# Altium PCB PCB.PcbDoc
Units mm, origin at the board's own origin, x right, y up, seen from the top; angles counter-clockwise.
Board outline 153.67 x 180.34 mm, 2 copper layers (Top Layer, Bottom Layer); 238 components, 189 nets, 780 pads, 0 vias.
Unrouted connection lines stored in the file: 557.
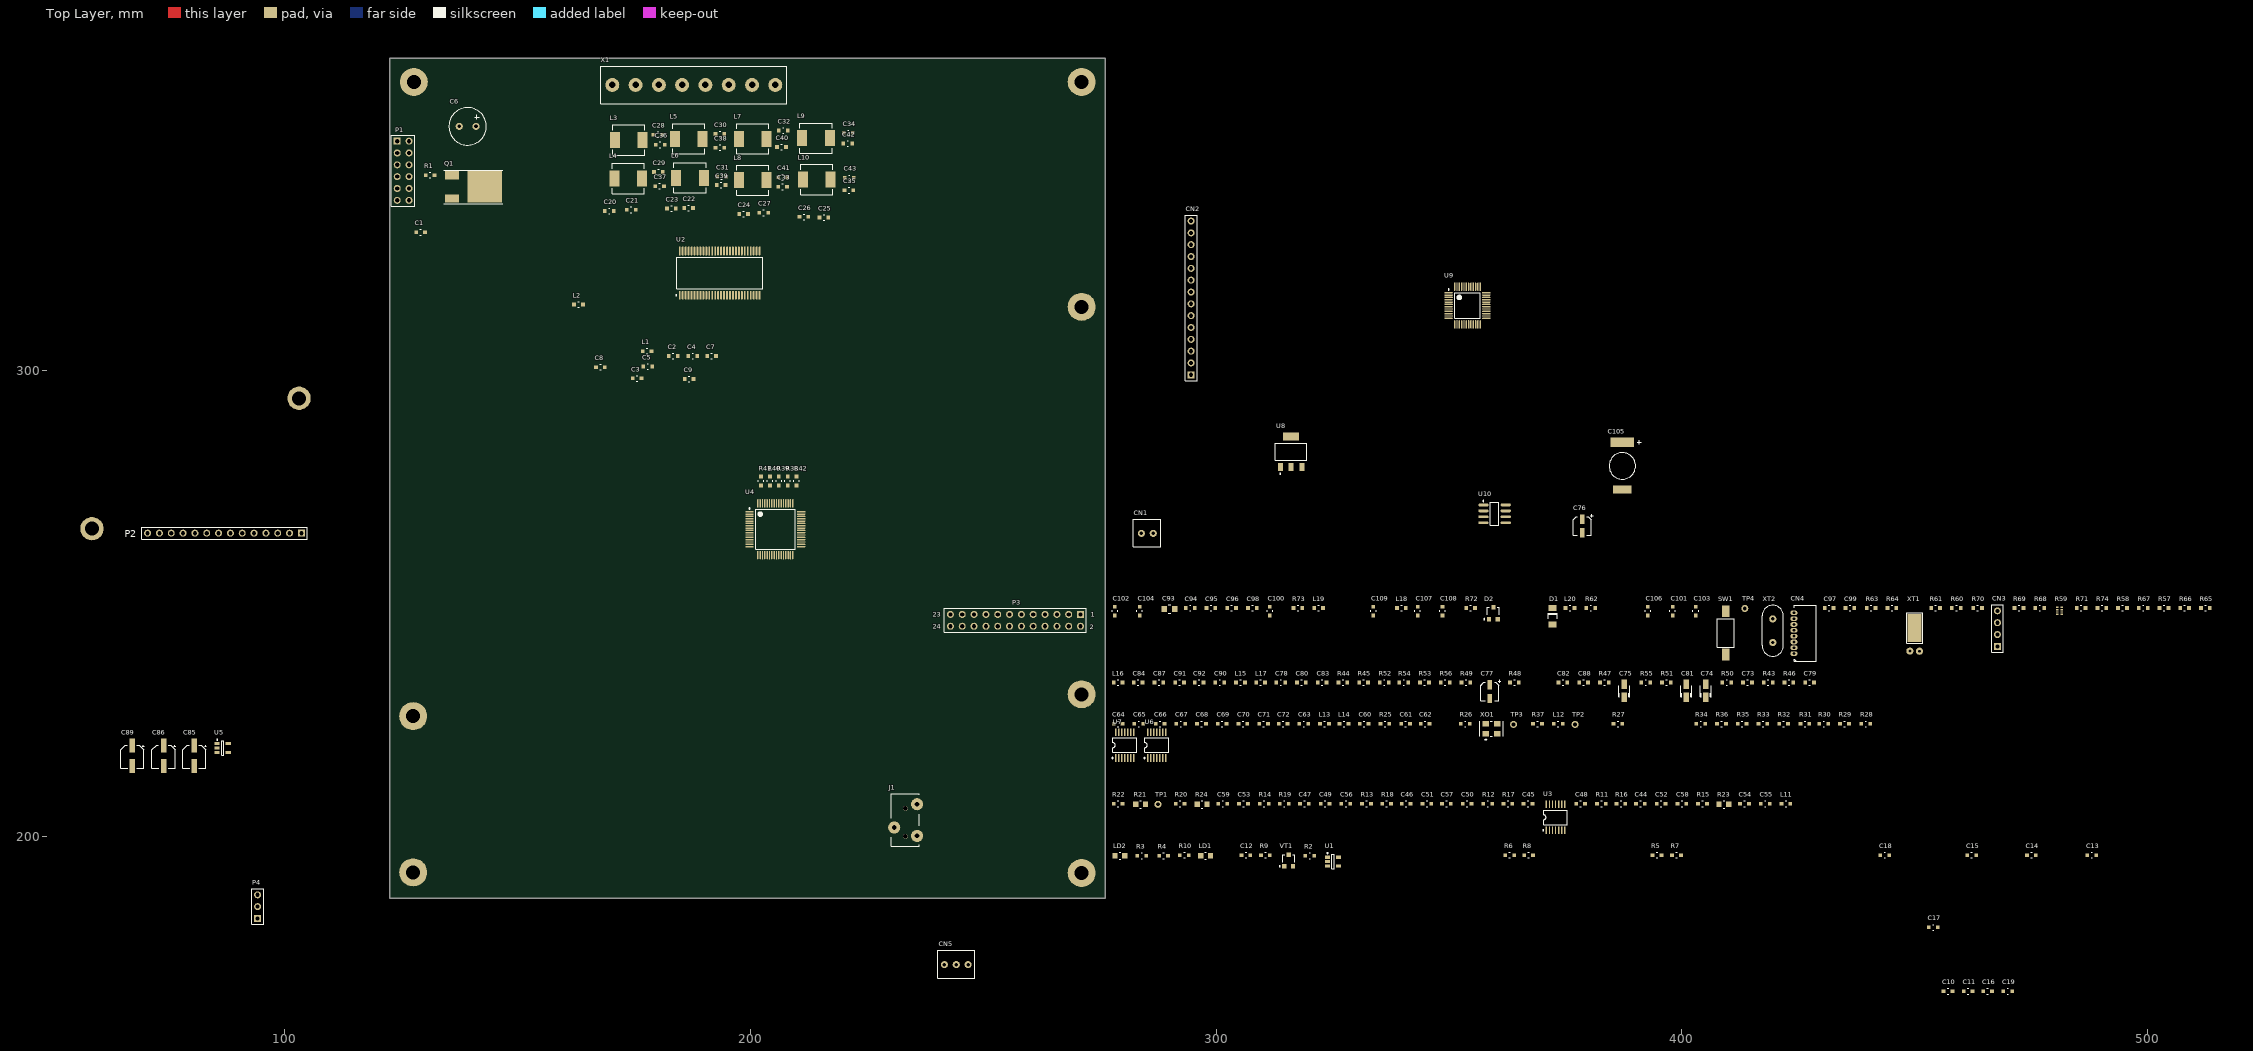
[diagram p0: Top Layer view]
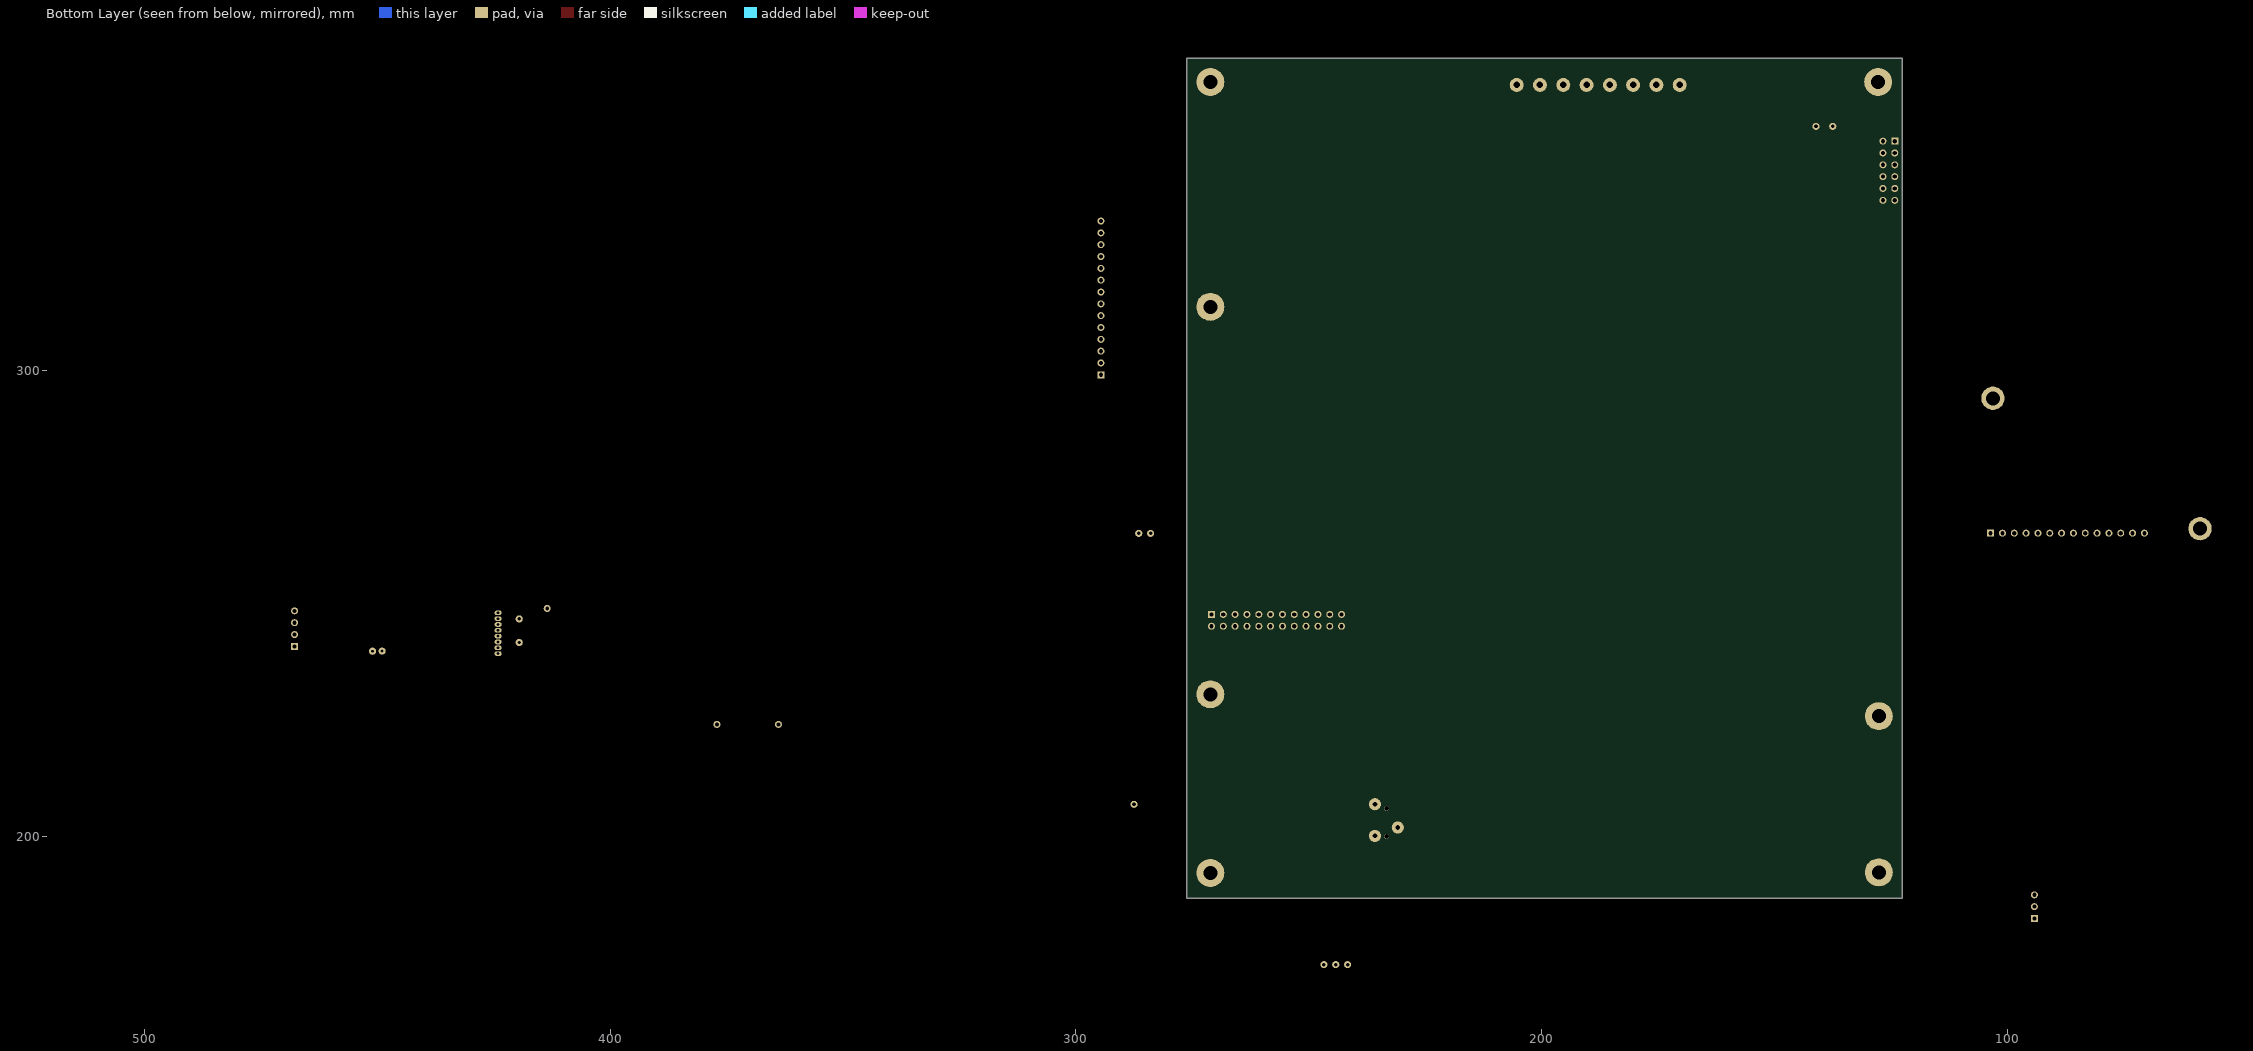
[diagram p1: Bottom Layer view, seen from below]

## Layer stack, top to bottom
Top Solder: solder mask 0.0102, Solder Resist, Dk 3.5
Top Layer: signal copper 0.0356
Dielectric 1: dielectric 0.32, FR-4, Dk 4.8
Bottom Layer: signal copper 0.0356
Bottom Solder: solder mask 0.0102, Solder Resist, Dk 3.5

## Board outline
122.555,367.03 122.555,186.69 276.225,186.69 276.225,367.03

## Design rules (kind name [scope] priority, off if disabled: settings)
Clearance [All] p1: gap=0.2 ignorepadtopadclearanceinfootprint=FALSE except(0.3: SMDPad-Fill SMDPad-Poly SMDPad-Region THPad-Fill THPad-Poly THPad-Region; 0.4: Arc-Fill Arc-Poly Arc-Region Track-Fill Track-Poly Track-Region Fill-Fill Fill-Poly Fill-Region Poly-Poly Poly-Region Region-Region)
DiffPairsRouting [All] p1: maxlimit=0.254 minlimit=0.2 mostfreqgap=0.22 toplayer_minwidth=0.2 toplayer_maxwidth=0.22 toplayer_prefwidth=0.22 bottomlayer_minwidth=0.2 bottomlayer_maxwidth=0.22 bottomlayer_prefwidth=0.22 maxuncoupledlength=12.7
HoleSize [All] p1: absolutevalues=TRUE maxlimit=5 minlimit=0.3 maxpercent=80.000 minpercent=20.000
PlaneConnect [All] p1: pad.planeconnectstyle=Relief pad.reliefexpansion=0.508 pad.reliefentries=4 pad.reliefconductorwidth=0.8 pad.reliefairgap=0.4 via.planeconnectstyle=Direct via.reliefexpansion=0.508 via.reliefentries=4 via.reliefconductorwidth=0.254 via.reliefairgap=0.254
PolygonConnect [All] p1: thpad.connectstyle=Relief thpad.reliefconductorwidth=0.8 thpad.reliefentries=4 thpad.polygonreliefangle="90 Angle" thpad.airgapwidth=0.4 smdpad.connectstyle=Relief smdpad.reliefconductorwidth=0.5 smdpad.reliefentries=4 smdpad.polygonreliefangle="90 Angle" smdpad.airgapwidth=0.4 via.connectstyle=Direct via.reliefconductorwidth=0.254 via.reliefentries=4 via.polygonreliefangle="90 Angle" via.airgapwidth=0.254
RoomDefinition mcu [InComponentClass('mcu')] p1 off: confinementstyle=ConfineIn formatcopy=TRUE lockcomponents=FALSE outline 277.368,237.236 526.034,237.236 526.034,251.968 277.368,251.968
RoomDefinition audio_in [InComponentClass('audio_in')] p2 off: confinementstyle=ConfineIn formatcopy=TRUE lockcomponents=FALSE outline 277.368,228.346 429.387,228.346 429.387,235.966 277.368,235.966
RoomDefinition audio_dsp [InComponentClass('audio_dsp')] p3 off: confinementstyle=ConfineIn formatcopy=TRUE lockcomponents=FALSE outline 284.988,210.947 463.804,210.947 463.804,226.822 284.988,226.822
RoomDefinition audio_amp_hf [InComponentClass('audio_amp_hf')] p4 off: confinementstyle=ConfineIn formatcopy=TRUE lockcomponents=FALSE outline 277.368,200.152 423.926,200.152 423.926,209.931 277.368,209.931
RoomDefinition audio_amp [InComponentClass('audio_amp')] p5 off: confinementstyle=ConfineIn formatcopy=TRUE lockcomponents=FALSE outline 277.368,188.214 619.887,188.214 619.887,198.882 277.368,198.882
RoutingVias [All] p1: holewidth=0.3 width=0.8 viastyle="Through Hole" minholewidth=0.3 minwidth=0.8 maxholewidth=0.6 maxwidth=1.5
SolderMaskExpansion [All] p1: expansion=0.102
Width [All] p1: maxlimit=4 minlimit=0.2 preferedwidth=0.3 minimp=50.000000 maximp=50.000000 favimp=50.000000
27 further rules are at their usual default settings.

## Classes and differential pairs
component class mcu: C10 C17 C20 C23 C28 C30 C31 C36 C39 C65 C78 C95 C97 C99 C102 C105 C107 CN2 CN3 CN4 CN5 D1 D2 L11 L18 L20 R29 R57 R59 R60 R61 R63 R64 R65 R66 R67 R68 R69 R70 R71 R72 R74 SW1 TP4 U8 U9 U10 XT1 XT2
component class audio_in: C15 C18 C23 C24 C25 C27 C32 C33 C40 C54 C57 C64 C73 C75 C76 C78 C81 C83 C89 C97 C99 CN1 CN2 CN3 L13 L14 L18 R9 R15 R19 R23 R32 R33 R43 R45 R46 R48 R50 R51 R55 R56 U1 U4 U6 U7 U8
component class audio_dsp: C18 C20 C25 C30 C44 C45 C48 C52 C60 C65 C75 C105 C106 L13 L14 L15 P1 P3 P4 R4 R6 R12 R16 R17 R19 R23 R31 R36 R37 R39 R40 R41 R46 R48 R64 R72 TP2 TP3 U4 XO1
component class audio_amp: C1 C2 C4 C5 C6 C7 C8 C9 C11 C12 C15 C17 C18 C20 C23 C24 C25 C27 C30 C31 C32 C33 C35 C36 C39 C47 C48 C49 C59 C65 C69 C72 C75 C78 C83 C86 C88 C91 C95 C97 C98 C102 C105 L1 L2 L3 L4 L5 L6 L7 L8 L9 L10 LD1 LD2 P4 Q1 R1 R4 R5 R9 R10 R21 R24 R32 R56 U1 U2 VT1 X1 X2 X3 X4
component class audio_amp_hf: C33 C35 C43 C46 C48 C49 C52 C53 C54 C56 C57 C58 C59 C60 C107 J1 L14 R2 R12 R13 R17 R18 R19 R21 R23 R24 R32 R44 R45 R56 TP1 U1

## Components (designator, comment, footprint, x,y, rotation, side; value= is the part's Value field where it differs from the comment)
C1 "GRM188R61E105KA12D" C0603 130.175,329.692 r180 top value="1uF 25v"
C2 "CC0603KRX7R9BB104" C0603 182.499,303.149 r0 top value=0.1uF
C3 "CC0603KRX7R9BB104" C0603 174.752,298.323 r0 top value=0.1uF
C4 "GRM21BR61E106KA73L" C0603 186.69,303.149 r0 top value="10uF 25v"
C5 "GRM188R61E105KA12D" C0603 177.038,300.863 r0 top value="1uF 25v"
C6 "EEUFC1V222" R08H04 139.319,352.425 r180 top value="2200uF 25v"
C7 "CC0603KRX7R9BB104" C0603 190.754,303.149 r0 top value=0.1uF
C8 "GRM188R61E105KA12D" C0603 166.878,300.736 r0 top value="1uF 25v"
C9 "GRM21BR61E106KA73L" C0603 185.928,298.196 r0 top value="10uF 25v"
C10 "CC0603KRX7R9BB104" C0603 456.184,166.751 r0 top value=0.1uF
C11 "GRM21BR61E106KA73L" C0603 460.502,166.751 r0 top value="10uF 25v"
C12 "CC0603KRX7R9BB104" C0603 305.435,195.961 r0 top value=0.1uF
C13 "GRM188R61E105KA12D" C0603 487.045,195.961 r0 top value="1uF 25v"
C14 "GRM188R61E105KA12D" C0603 474.091,195.961 r0 top value="1uF 25v"
C15 "GRM188R61E105KA12D" C0603 461.264,195.961 r0 top value="1uF 25v"
C16 "CC0603KRX7R9BB104" C0603 464.693,166.751 r0 top value=0.1uF
C17 "GRM188R61E105KA12D" C0603 453.009,180.467 r0 top value="1uF 25v"
C18 "GRM188R61E105KA12D" C0603 442.595,195.961 r0 top value="1uF 25v"
C19 "GRM21BR61E106KA73L" C0603 469.011,166.751 r0 top value="10uF 25v"
C20 "CL10A225KA8NNNC" C0603 168.783,334.264 r0 top value="2.2uF 25v"
C21 "CL10A225KA8NNNC" C0603 173.482,334.518 r0 top value="2.2uF 25v"
C22 "CL10A225KA8NNNC" C0603 185.801,334.899 r0 top value="2.2uF 25v"
C23 "CL10A225KA8NNNC" C0603 182.118,334.772 r0 top value="2.2uF 25v"
C24 "CL10A225KA8NNNC" C0603 197.612,333.629 r0 top value="2.2uF 25v"
C25 "CL10A225KA8NNNC" C0603 214.862,332.867 r0 top value="2.2uF 25v"
C26 "CL10A225KA8NNNC" C0603 210.566,332.994 r0 top value="2.2uF 25v"
C27 "CL10A225KA8NNNC" C0603 201.93,333.883 r0 top value="2.2uF 25v"
C28 "CL10A105KB8NNNC" C0603 179.197,350.647 r0 top value="1uF 50v"
C29 "CL10A105KB8NNNC" C0603 179.324,342.646 r0 top value="1uF 50v"
C30 "CL10A105KB8NNNC" C0603 192.532,350.774 r0 top value="1uF 50v"
C31 "CL10A105KB8NNNC" C0603 192.913,341.63 r0 top value="1uF 50v"
C32 "CL10A105KB8NNNC" C0603 206.121,351.536 r0 top value="1uF 50v"
C33 "CL10A105KB8NNNC" C0603 205.994,339.471 r0 top value="1uF 50v"
C34 "CL10A105KB8NNNC" C0603 220.091,351.028 r0 top value="1uF 50v"
C35 "CL10A105KB8NNNC" C0603 220.218,338.709 r0 top value="1uF 50v"
C36 "CL10B103KB8NNNC" C0603 179.705,348.488 r0 top value=0.01uF
C37 "CL10B103KB8NNNC" C0603 179.578,339.598 r0 top value=0.01uF
C38 "CL10B103KB8NNNC" C0603 192.532,347.853 r0 top value=0.01uF
C39 "CL10B103KB8NNNC" C0603 192.786,339.852 r0 top value=0.01uF
C40 "CL10B103KB8NNNC" C0603 205.74,347.98 r0 top value=0.01uF
C41 "CL10B103KB8NNNC" C0603 205.994,341.503 r0 top value=0.01uF
C42 "CL10B103KB8NNNC" C0603 219.964,348.742 r0 top value=0.01uF
C43 "CL10B103KB8NNNC" C0603 220.302,341.376 r0 top value=0.01uF
C44 "CC0603MRX5R5BB106" C0603 390.144,207.01 r0 top value="10uF 6.3V"
C45 "CC0603MRX5R5BB106" C0603 366.014,207.01 r0 top value="10uF 6.3V"
C46 "CC0603MRX5R5BB106" C0603 339.852,207.01 r0 top value="10uF 6.3V"
C47 "CC0603MRX5R5BB106" C0603 318.008,207.01 r0 top value="10uF 6.3V"
C48 "CC0603JRNPO9BN151" C0603 377.317,207.01 r0 top value=150pF
C49 "CC0603JRNPO9BN151" C0603 322.453,207.01 r0 top value=150pF
C50 "CC0603JRNPO9BN470" C0603 352.933,207.01 r0 top value=47pF
C51 "CC0603JRNPO9BN470" C0603 344.297,207.01 r0 top value=47pF
C52 "CC0603JRNPO9BN470" C0603 394.589,207.01 r0 top value=47pF
C53 "CC0603JRNPO9BN470" C0603 304.927,207.01 r0 top value=47pF
C54 "CC0603MRX5R5BB106" C0603 412.496,207.01 r0 top value="10uF 6.3V"
C55 "C1608X7R1H104K080AA" C0603 416.941,207.01 r0 top value=0.1uF
C56 "GRM188R61H105KAALD" C0603 326.898,207.01 r0 top value=1uF
C57 "GRM188R61H105KAALD" C0603 348.488,207.01 r0 top value=1uF
C58 "CL10B103KB8NNNC" C0603 399.034,207.01 r0 top value=0.01uF
C59 "CL10B103KB8NNNC" C0603 300.482,207.01 r0 top value=0.01uF
C60 "CC0603KRX7R9BB104" C0603 330.835,224.155 r0 top value=0.1uF
C61 "30pF" C0603 339.725,224.155 r0 top value=15pF
C62 "1.2nF" C0603 343.916,224.155 r0 top
C63 "CC0603MRX5R5BB106" C0603 317.881,224.155 r0 top value="10uF 6.3v"
C64 "CC0603KRX7R9BB104" C0603 278.003,224.155 r0 top value=0.1uF
C65 "CC0603KRX7R9BB104" C0603 282.448,224.155 r0 top value=0.1uF
C66 "CC0603KRX7R9BB104" C0603 287.02,224.155 r0 top value=0.1uF
C67 "CC0603KRX7R9BB104" C0603 291.465,224.155 r0 top value=0.1uF
C68 "CC0603KRX7R9BB104" C0603 295.91,224.155 r0 top value=0.1uF
C69 "CC0603KRX7R9BB104" C0603 300.355,224.155 r0 top value=0.1uF
C70 "CC0603KRX7R9BB104" C0603 304.8,224.155 r0 top value=0.1uF
C71 "CC0603KRX7R9BB104" C0603 309.245,224.155 r0 top value=0.1uF
C72 "CC0603KRX7R9BB104" C0603 313.436,224.155 r0 top value=0.1uF
C73 "CC0603KRX7R9BB104" C0603 413.131,233.045 r0 top value=0.1uF
C74 "CAP_POL" TANTAL-A-1206 405.13,231.267 r90 top value=1uF
C75 "CAP_POL" TANTAL-A-1206 387.604,231.267 r90 top value=1uF
C76 "UWT1V3R3MCL2B" ALUM_3.3 378.587,266.7 r0 top value=3.3uF
C77 "UWT1V3R3MCL2B" ALUM_3.3 358.775,231.14 r0 top value=3.3uF
C78 "0.01uF" C0603 312.928,233.045 r0 top
C79 "10pF" C0603 426.466,233.045 r0 top
C80 "0.01uF" C0603 317.373,233.045 r0 top
C81 "CAP_POL" TANTAL-A-1206 400.939,231.267 r90 top value=1uF
C82 "CC0603KRX7R9BB104" C0603 373.507,233.045 r0 top value=0.1uF
C83 "CC0603KRX7R9BB104" C0603 321.818,233.045 r0 top value=0.1uF
C84 "CC0603KRX7R9BB104" C0603 282.321,233.045 r0 top value=0.1uF
C85 "EEEFP1C100AR" ALUM_5x5.4 80.645,217.297 r0 top value=10uF
C86 "CB016M0010RSB-0405" ALUM_5x5.4 74.041,217.297 r0 top value=10uF
C87 "CC0603KRX7R9BB104" C0603 286.766,233.045 r0 top value=0.1uF
C88 "0.01uF" C0603 377.952,233.045 r0 top
C89 "CB016M0010RSB-0405" ALUM_5x5.4 67.31,217.297 r0 top value=10uF
C90 "CC0603MRX5R5BB106" C0603 299.847,233.045 r0 top value="10uF 6.3v"
C91 "CC0603KRX7R9BB104" C0603 291.211,233.045 r0 top value=0.1uF
C92 "CC0603KRX7R9BB104" C0603 295.402,233.045 r0 top value=0.1uF
C93 "GRM21BR61E106KA73L" C0805 289.052,248.793 r0 top value="10uF 25v"
C94 "CC0603MRX5R5BB106" C0603 293.497,249.047 r0 top value="10uF 6.3v"
C95 "CC0603KRX7R9BB104" C0603 297.942,249.047 r0 top value=0.1uF
C96 "CC0603KRX7R9BB104" C0603 302.387,249.047 r0 top value=0.1uF
C97 "22pF" C0603 430.657,249.047 r0 top
C98 "CC0603KRX7R9BB104" C0603 306.832,249.047 r0 top value=0.1uF
C99 "22pF" C0603 435.102,249.047 r0 top
C100 "CC0603KRX7R9BB104" C0603 311.531,247.396 r90 top value=0.1uF
C101 "22pF" C0603 398.018,247.396 r90 top
C102 "CC0603KRX7R9BB104" C0603 278.257,247.396 r90 top value=0.1uF
C103 "22pF" C0603 402.971,247.396 r90 top
C104 "CC0603MRX5R5BB106" C0603 283.591,247.396 r90 top value="10uF 6.3v"
C105 "CAP_POL" DS/DSK 387.223,279.527 r0 top value=0.22F
C106 "C1608X7R1H104K080AA" C0603 392.684,247.396 r90 top value=0.1uF
C107 "CC0603KRX7R9BB104" C0603 343.281,247.396 r90 top value=0.1uF
C108 "CC0603MRX5R5BB106" C0603 348.615,247.396 r90 top value="10uF 6.3v"
C109 "100pF" C0603 333.756,247.396 r90 top
CN1 "MIC" DG308-2.54-2P 285.242,265.049 r0 top
CN2 "AUX" PLS-14 294.64,299.085 r90 top
CN3 "SWD" PLS-4 467.741,240.792 r90 top
CN4 "KEYS" 1.25-8AW 424.053,243.586 r90 top
CN5 "DGxxx-3" DG308-2.54-3P 244.221,172.466 r0 top
D1 "SHOTTKY" SOD-80C 372.237,247.269 r90 top value=BAS86
D2 "PESD" SOT-23-3 359.537,247.904 r0 top value=PESDCAN
J1 "AUB-13" AUB-13 233.299,203.2 r90 top value="HP Jack"
L1 "BLM18AG102SN1D" IND0603 176.911,304.165 r0 top value=EMIF
L2 "BLM18AG102SN1D" IND0603 162.179,314.198 r0 top value=EMIF
L3 "IHLP2525CZER3R3M01" IHLP-2525CZ 173.936,349.504 r0 top value=3.3uH
L4 "IHLP2525CZER3R3M01" IHLP-2525CZ 173.809,341.249 r0 top value=3.3uH
L5 "IHLP2525CZER3R3M01" IHLP-2525CZ 186.817,349.758 r0 top value=3.3uH
L6 "IHLP2525CZER3R3M01" IHLP-2525CZ 187.071,341.376 r0 top value=3.3uH
L7 "IHLP2525CZER3R3M01" IHLP-2525CZ 200.533,349.758 r0 top value=3.3uH
L8 "IHLP2525CZER3R3M01" IHLP-2525CZ 200.533,340.868 r0 top value=3.3uH
L9 "IHLP2525CZER3R3M01" IHLP-2525CZ 214.122,349.885 r0 top value=3.3uH
L10 "IHLP2525CZER3R3M01" IHLP-2525CZ 214.249,340.995 r0 top value=3.3uH
L11 "BLM18AG102SN1D" IND0603 421.386,207.01 r0 top value=EMIF
L12 "BLM18AG102SN1D" IND0603 372.491,224.155 r0 top value=EMIF
L13 "BLM18AG102SN1D" IND0603 322.326,224.155 r0 top value=EMIF
L14 "BLM18AG102SN1D" IND0603 326.517,224.155 r0 top value=EMIF
L15 "BLM18AG102SN1D" IND0603 304.292,233.045 r0 top value=EMIF
L16 "BLM18AG102SN1D" IND0603 278.003,233.045 r0 top value=EMIF
L17 "BLM18AG102SN1D" IND0603 308.61,233.045 r0 top value=EMIF
L18 "BLM18AG102SN1D" IND0603 338.836,249.047 r0 top value=EMIF
L19 "BLM18AG102SN1D" IND0603 321.056,249.047 r0 top value=EMIF
L20 "BLM18AG102SN1D" IND0603 375.031,249.047 r0 top value=EMIF
LD1 "LED_Y" R0805 296.799,195.834 r0 top
LD2 "LED_R" R0805 278.384,195.834 r0 top
P1 "VIN" PLD-6 124.206,349.25 r270 top locked
P2 "HDR 14" PLS-14 103.632,265.091 r180 top locked
P3 "AUX AUDIO" PLD-12 270.901,247.65 r180 top locked
P4 "HDR 3" PLS-3 94.234,182.372 r90 top
Q1 "IRFR5305" D-PAK 140.716,339.344 r270 top
R1 "RES" R0603 132.207,341.944 r180 top value=47k
R2 "RES" R0603 319.151,195.834 r0 top value=10k
R3 "RES" R0603 283.083,195.834 r0 top value=10k
R4 "RES" R0603 287.782,195.834 r0 top value=10k
R5 "47k" R0603 393.7,195.961 r0 top value=DNI
R6 "47k" R0603 362.077,195.961 r0 top value=0
R7 "47k" R0603 397.891,195.961 r0 top value=DNI
R8 "47k" R0603 366.141,195.961 r0 top value=0
R9 "470" R0603 309.626,195.961 r0 top
R10 "470" R0603 292.227,195.961 r0 top
R11 "30k" R0603 381.762,207.01 r0 top
R12 "30k" R0603 357.378,207.01 r0 top
R13 "30k" R0603 331.343,207.01 r0 top
R14 "30k" R0603 309.372,207.01 r0 top
R15 "30k" R0603 403.479,207.01 r0 top
R16 "43k" R0603 385.953,207.01 r0 top
R17 "43k" R0603 361.696,207.01 r0 top
R18 "43k" R0603 335.661,207.01 r0 top
R19 "43k" R0603 313.69,207.01 r0 top
R20 "30k" R0603 291.338,207.01 r0 top
R21 "100" R0805 282.829,206.883 r0 top
R22 "100k" R0603 278.003,207.01 r0 top
R23 "10" R0805 408.051,206.883 r0 top
R24 "10" R0805 296.037,206.883 r0 top
R25 "47k" R0603 335.28,224.155 r0 top value=100k
R26 "22" R0603 352.552,224.155 r0 top
R27 "0" R0603 385.318,224.155 r0 top
R28 "0" R0603 438.531,224.155 r0 top
R29 "22" R0603 433.959,224.155 r0 top
R30 "22" R0603 429.514,224.155 r0 top
R31 "22" R0603 425.45,224.155 r0 top
R32 "22" R0603 420.878,224.155 r0 top
R33 "22" R0603 416.433,224.155 r0 top
R34 "0" R0603 403.098,224.155 r0 top
R35 "100k" R0603 411.988,224.155 r0 top
R36 "100k" R0603 407.543,224.155 r0 top
R37 "3.4k" R0603 368.046,224.155 r0 top
R38 "22" R0603 208.026,277.241 r270 top
R39 "22" R0603 206.123,277.241 r270 top
R40 "22" R0603 204.216,277.241 r270 top
R41 "22" R0603 202.311,277.241 r270 top
R42 "22" R0603 209.931,277.241 r270 top
R43 "5.6k" R0603 417.576,233.045 r0 top
R44 "100k" R0603 326.263,233.045 r0 top
R45 "100k" R0603 330.708,233.045 r0 top
R46 "75k" R0603 422.021,233.045 r0 top
R47 "75k" R0603 382.397,233.045 r0 top
R48 "100" R0603 363.093,233.045 r0 top
R49 "100" R0603 352.679,233.045 r0 top
R50 "75k" R0603 408.686,233.045 r0 top (schematic designator R49)
R51 "100" R0603 395.732,233.045 r0 top
R52 "0" R0603 335.153,233.045 r0 top
R53 "DNI" R0603 343.789,233.045 r0 top
R54 "0" R0603 339.344,233.045 r0 top
R55 "22" R0603 391.287,233.045 r0 top
R56 "22" R0603 348.234,233.045 r0 top
R57 "22" R0603 502.539,249.047 r0 top
R58 "22" R0603 493.649,249.047 r0 top
R59 "TC124-JR-0722RL" R0804X4 481.076,248.412 r0 top value=22
R60 "22" R0603 457.962,249.047 r0 top
R61 "22" R0603 453.517,249.047 r0 top
R62 "1k" R0603 379.476,249.047 r0 top
R63 "390" R0603 439.674,249.047 r0 top
R64 "0" R0603 444.119,249.047 r0 top value=1k
R65 "100" R0603 511.429,249.047 r0 top
R66 "22" R0603 506.984,249.047 r0 top
R67 "22" R0603 498.094,249.047 r0 top
R68 "22" R0603 475.869,249.047 r0 top
R69 "22" R0603 471.424,249.047 r0 top
R70 "22" R0603 462.534,249.047 r0 top
R71 "2k" R0603 484.759,249.047 r0 top
R72 "62" R0603 353.695,249.047 r0 top
R73 "62" R0603 316.611,249.047 r0 top
R74 "2k" R0603 489.204,249.047 r0 top
SW1 "RESET" TACTM-34N-F 409.448,243.586 r90 top value="SW tact 2-pin"
TP1 "TEST-POINT" PAD 287.528,206.883 r0 top
TP2 "TEST-POINT" PAD 377.063,224.028 r0 top
TP3 "TEST-POINT" PAD 363.855,224.028 r0 top
TP4 "TEST-POINT" PAD 413.512,248.92 r0 top (schematic designator TP3)
U1 "SN74LVC1G08DBVR" SOT-23-5 325.12,194.564 r0 top value=SN74LVC1G08
U2 "TAS6424" HSSOP-56 193.421,320.929 r90 top
U3 "TPA6138A2PW" TSSOP-14 372.872,204.089 r0 top
U4 "STA309A" PM064_N 205.373,265.938 r0 top
U5 "OPA172IDBVR" SOT-23-5 86.741,218.948 r0 top
U6 "PCM1808" TSSOP-14 287.274,219.583 r0 top
U7 "PCM1808" TSSOP-14 280.416,219.583 r0 top
U8 "1117-xxx" SOT-223 316.103,282.575 r0 top value=1117-3.3
U9 "STM32F303CBT6" STM-LQFP48_N 353.963,313.956 r0 top
U10 "SN65HVD232" D008_N 359.791,269.24 r0 top value=SN65HVD232D
VT1 "BC817" SOT-23-3 315.595,194.818 r0 top
X1 "DGxxx-8" DG126-5.0-8P 187.873,361.315 r0 top
XO1 "CXO-7C 12.288" CXO-5032 359.156,223.139 r0 top value=CXO-7C
XT1 "XTAL" DT38 449.961,243.967 r90 top value="32.768 KHz"
XT2 "XTAL" HC-49/S 419.481,244.094 r90 top value="8 MHz"

## Footprints (in the part's own frame and the unit in brackets; to place one, negate y for a bottom-side part, rotate by r counter-clockwise, add the part's x,y. Pads: shape width x height; smd on the part's side, far side on the other; paste and mask are expansions set on the pad)
1.25-8AW [mm] "Connector; 8 Positions; Right Angle"
  oval 1x1.5 hole 0.6: 1(-4.35,0) 2(-3.1,0) 3(-1.85,0) 4(-0.6,0) 5(0.65,0) 6(1.9,0) 7(3.15,0) 8(4.4,0)
  silkscreen extent -6.02,-4.8 6.05,-0.07, body extent -5.83,-4.5 5.83,0.9, height 3.68
ALUM_3.3 [mm]
  rect 1x2 smd: 1(0,1.397) 2(0,-1.524)
  silkscreen extent -1.91,-2.03 2.38,2.46, body extent -2.16,-2.3 2.14,2.3, height 5.63
ALUM_5x5.4 [mm]
  rect 1.2x3 smd: 1(0,2.2) 2(0,-2.2)
  silkscreen extent -2.5,-2.7 2.6,2.3, body extent -2.65,-3.2 2.65,2.8, height 5.9
AUB-13 [mm] "Stereo jack socket 3,5mm"
  round 2.6 hole 1: 1(-3.1,-2.5) 2(-1.3,2.4) 3(3.7,-2.5)
  round 1 hole 1 unplated: H(-3.2,0) H(2.8,0)
  silkscreen extent -5.3,-3 5.9,3, body extent -6.3,-2.5 4.7,2.5, height 4.25
C0603 [mm]
  rect 0.8x0.8 smd: 1(1.905,0) 2(0,0)
  silkscreen extent 0.8,-0.6 1.1,0.6, body extent 0.2,-0.4 1.8,0.4, height 0.9
C0805 [mm]
  rect 1.14x1.27 smd: 1(2.1,0) 2(-0.2,0)
  silkscreen extent 0.7,-0.9 1.2,0.9, body extent 0,-0.6 2,0.6, height 0.9
CXO-5032 [mm] "TXC 7C SMD CMOS CXO Oscillators"
  rect 1.4x1.2 smd: 1(-1.288,-1.134) 2(1.252,-1.134) 3(1.227,1.079) 4(-1.313,1.079)
  silkscreen extent -2.55,-2.37 2.45,1.63, body extent -1.65,-1.3 1.65,1.3, height 0.8
D008_N [mm] "8-Pin Small Outline Integrated Circuit 1.27 mm Pitch, IPC Medium Density"
  oval 2.2x0.6 smd: 1(-2.4,1.905) 2(-2.4,0.635) 3(-2.4,-0.635) 4(-2.4,-1.905) 5(2.4,-1.905) 6(2.4,-0.635) 7(2.4,0.635) 8(2.4,1.905)
  silkscreen extent -2.52,-2.5 0.9,2.88, body extent -3,-2.45 3,2.45, height 1.7
D-PAK [mm]
  rect 1.8x3 smd: 1(-2.6,-4.8) 3(2.4,-4.8)
  rect 6.8x7.47 smd: 2(-0.1,2.3)
  silkscreen extent -3.7,-6.5 3.5,6.1, body extent -3.4,-4.67 3.14,5.27, height 2.41
DG126-5.0-8P [mm] "PCB terminal block"
  round 3 hole 1.4: 1(-17.5,0) 2(-12.5,0) 3(-7.5,0) 4(-2.5,0) 5(2.5,0) 6(7.5,0) 7(12.5,0) 8(17.5,0)
  silkscreen extent -20,-4 20,4, body extent -20.25,-3.9 20,3.9, height 10.2
DG308-2.54-2P [mil] "PCB terminal block"
  round 60 hole 30: 1(-50,0) 2(50,0)
  silkscreen extent -120,-115 115,120, body extent -118,-119 110,119, height 308
DG308-2.54-3P [mil] "PCB terminal block"
  round 60 hole 30: 1(-100,0) 2(0,0) 3(100,0)
  silkscreen extent -155,-115 155,120, body extent -160,-117 155,120, height 308
DS/DSK [mm] "Coin Cell Capacitors"
  rect 5x2 smd: 1(0,5.1)
  rect 4x1.7 smd: 2(0,-5.1)
  silkscreen extent -2.84,-2.84 4,5.5, body extent -3.4,-5.75 3.4,5.95, height 2.8
DT38 [mm]
  round 1.54 hole 0.6: 1(-4.209,-1.023) 2(-4.191,1.016)
  rect 6x3 smd: 3(0.8,0)
  silkscreen extent -2.5,-1.7 4,1.7, body extent -5.27,-1.4 5.78,1.6, height 3
HC-49/S [mm]
  round 1.54 hole 0.7: 1(-2.48,-0.04) 2(2.6,-0.04)
  silkscreen extent -5.4,-2.33 5.52,2.25, body extent -5.4,-2.25 5.4,2.25, height 3.5
HSSOP-56 [mm] "PowerPAD HSSOP, 56-Leads, Body 18,41x7,49mm, Pitch 0.635mm, IPC Medium Density"
  oval 1.9x0.4 smd: 1(-4.75,8.572) 2(-4.75,7.938) 3(-4.75,7.302) 4(-4.75,6.667) 5(-4.75,6.032) 6(-4.75,5.397) 7(-4.75,4.763) 8(-4.75,4.127) 9(-4.75,3.492) 10(-4.75,2.858) 11(-4.75,2.222) 12(-4.75,1.587) 13(-4.75,0.952) 14(-4.75,0.317) 15(-4.75,-0.318) 16(-4.75,-0.953) 17(-4.75,-1.588) 18(-4.75,-2.223) 19(-4.75,-2.858) 20(-4.75,-3.492) 21(-4.75,-4.127) 22(-4.75,-4.763) 23(-4.75,-5.398) 24(-4.75,-6.032) 25(-4.75,-6.667) 26(-4.75,-7.303) 27(-4.75,-7.938) 28(-4.75,-8.572) 29(4.75,-8.572) 30(4.75,-7.938) 31(4.75,-7.302) 32(4.75,-6.667) 33(4.75,-6.032) 34(4.75,-5.397) 35(4.75,-4.763) 36(4.75,-4.128) 37(4.75,-3.492) 38(4.75,-2.857) 39(4.75,-2.222) 40(4.75,-1.587) 41(4.75,-0.952) 42(4.75,-0.317) 43(4.75,0.318) 44(4.75,0.953) 45(4.75,1.588) 46(4.75,2.223) 47(4.75,2.858) 48(4.75,3.492) 49(4.75,4.127) 50(4.75,4.763) 51(4.75,5.397) 52(4.75,6.032) 53(4.75,6.667) 54(4.75,7.302) 55(4.75,7.938) 56(4.75,8.572)
  silkscreen extent -4.87,-9.25 3.4,9.45, body extent -5.14,-9.2 5.14,9.2, height 2.41
IHLP-2525CZ [mm] "Low-Profile, High-Current IHLP® Inductor"
  rect 2.15x3.429 smd: 1(-2.975,0) 2(2.975,0)
  silkscreen extent -3.45,-3.25 3.45,3.25, body extent -3.54,-3.3 3.54,3.37, height 2.89
IND0603 [mm]
  rect 0.8x0.8 smd: 1(1.905,0) 2(0,0)
  silkscreen extent 0.8,-0.6 1.1,0.6
PAD [mm]
  round 1.5 hole 0.8: 1(0,0)
PLD-6 [mm] "Connector; Header; 6x2 Position"
  rect 1.5x1.5 hole 0.9: 1(0,0)
  round 1.5 hole 0.9: 2(0,2.54) 3(2.54,0) 4(2.54,2.54) 5(5.08,0) 6(5.08,2.54) 7(7.62,0) 8(7.62,2.54) 9(10.16,0) 10(10.16,2.54) 11(12.7,0) 12(12.7,2.54)
  silkscreen extent -1.27,-1.27 13.97,3.81
PLD-12 [mm] "Connector; Header; 12x2 Position"
  rect 1.5x1.5 hole 0.9: 1(0,0)
  round 1.5 hole 0.9: 2(0,2.54) 3(2.54,0) 4(2.54,2.54) 5(5.08,0) 6(5.08,2.54) 7(7.62,0) 8(7.62,2.54) 9(10.16,0) 10(10.16,2.54) 11(12.7,0) 12(12.7,2.54) 13(15.24,0) 14(15.24,2.54) 15(17.78,0) 16(17.78,2.54) 17(20.32,0) 18(20.32,2.54) 19(22.86,0) 20(22.86,2.54) 21(25.4,0) 22(25.4,2.54) 23(27.94,0) 24(27.94,2.54)
  silkscreen extent -1.27,-1.27 29.21,3.81
PLS-3 [mm] "Connector; Header; 3 Position"
  rect 1.5x1.5 hole 0.9: 1(0,0)
  round 1.5 hole 0.9: 2(2.54,0) 3(5.08,0)
  silkscreen extent -1.27,-1.27 6.35,1.27, body extent -1.27,-1.27 6.35,1.27, height 8.54
PLS-4 [mm] "Connector; Header; 4 Position"
  rect 1.5x1.5 hole 0.9: 1(0,0)
  round 1.5 hole 0.9: 2(2.54,0) 3(5.08,0) 4(7.62,0)
  silkscreen extent -1.27,-1.27 8.89,1.27, body extent -1.27,-1.27 8.89,1.27, height 8.44
PLS-14 [mm] "Connector; Header; 14 Position"
  rect 1.5x1.5 hole 0.9: 1(0,0)
  round 1.5 hole 0.9: 2(2.54,0) 3(5.08,0) 4(7.62,0) 5(10.16,0) 6(12.7,0) 7(15.24,0) 8(17.78,0) 9(20.32,0) 10(22.86,0) 11(25.4,0) 12(27.94,0) 13(30.48,0) 14(33.02,0)
  silkscreen extent -1.27,-1.27 34.29,1.27
PM064_N [mm] "64-Pin Thin Quad Flat Pack 0.5 mm Pitch, IPC Medium Density"
  oval 1.8x0.3 smd: 1(-5.55,3.75) 2(-5.55,3.25) 3(-5.55,2.75) 4(-5.55,2.25) 5(-5.55,1.75) 6(-5.55,1.25) 7(-5.55,0.75) 8(-5.55,0.25) 9(-5.55,-0.25) 10(-5.55,-0.75) 11(-5.55,-1.25) 12(-5.55,-1.75) 13(-5.55,-2.25) 14(-5.55,-2.75) 15(-5.55,-3.25) 16(-5.55,-3.75) 33(5.55,-3.75) 34(5.55,-3.25) 35(5.55,-2.75) 36(5.55,-2.25) 37(5.55,-1.75) 38(5.55,-1.25) 39(5.55,-0.75) 40(5.55,-0.25) 41(5.55,0.25) 42(5.55,0.75) 43(5.55,1.25) 44(5.55,1.75) 45(5.55,2.25) 46(5.55,2.75) 47(5.55,3.25) 48(5.55,3.75)
  oval 0.3x1.8 smd: 17(-3.75,-5.55) 18(-3.25,-5.55) 19(-2.75,-5.55) 20(-2.25,-5.55) 21(-1.75,-5.55) 22(-1.25,-5.55) 23(-0.75,-5.55) 24(-0.25,-5.55) 25(0.25,-5.55) 26(0.75,-5.55) 27(1.25,-5.55) 28(1.75,-5.55) 29(2.25,-5.55) 30(2.75,-5.55) 31(3.25,-5.55) 32(3.75,-5.55) 49(3.75,5.55) 50(3.25,5.55) 51(2.75,5.55) 52(2.25,5.55) 53(1.75,5.55) 54(1.25,5.55) 55(0.75,5.55) 56(0.25,5.55) 57(-0.25,5.55) 58(-0.75,5.55) 59(-1.25,5.55) 60(-1.75,5.55) 61(-2.25,5.55) 62(-2.75,5.55) 63(-3.25,5.55) 64(-3.75,5.55)
  silkscreen extent -5.67,-4.25 4.25,4.57, body extent -5,-5 5,5, height 1.6
R08H04 [mil] "Radius 8mm, between holes 4mm"
  round 60 hole 30: 1(-70.87,0) 2(70.87,0)
  silkscreen extent -158,-158 158,158, body extent -157,-157 157,157, height 472
R0603 [mm]
  rect 0.8x0.8 smd: 1(1.905,0) 2(0,0)
  silkscreen extent 0.8,-0.6 1.1,0.6, body extent 0.2,-0.4 1.8,0.4, height 0.5
R0804X4 [mm] "Chip Array, Flat, 8-Leads, Pitch 0,50mm,  Body 2,00x1,00mm,  IPC Medium Density"
  rect 0.5x0.3 smd: 1(-0.5,0.75) 2(0.5,0.75) 3(-0.5,0.25) 4(0.5,0.25) 5(-0.5,-0.25) 6(0.5,-0.25) 7(-0.5,-0.75) 8(0.5,-0.75)
  body extent -0.5,-1 0.5,1, height 0.4
R0805 [mm]
  rect 1.14x1.2 smd: 1(2,0) 2(-0.1,0)
  silkscreen extent 0.79,-0.8 1.1,0.8, body extent 0,-0.6 2,0.6, height 0.5
SOD-80C [mm]
  rect 1.25x1.7 smd: 1(-1.775,0) 2(1.775,0)
  silkscreen extent -0.6,-1 0.6,0.9, body extent -1.82,-0.8 1.88,0.8, height 1.6
SOT-23-3 [mm]
  rect 0.9x0.95 smd: 1(-0.95,-1.25) 2(0.95,-1.25) 3(0,1.25)
  silkscreen extent -2.07,-1.37 1.3,1.25, body extent -1.52,-1.29 1.48,1.25, height 1.1
SOT-23-5 [mm] "SOT23, 5-Leads, Body 2.9x1.6mm, Pitch 0.95mm, Lead Span 2.8mm, IPC Medium Density"
  rect 1.1x0.65 smd: 1(-1.2,0.95) 2(-1.2,0) 3(-1.2,-0.95) 4(1.2,-0.95) 5(1.2,0.95)
  silkscreen extent -1.32,-1.55 0.25,1.95, body extent -1.44,-1.5 1.4,1.5, height 1.1
SOT-223 [mm]
  rect 1.05x1.75 smd: 1(-2.3,-3.3) 2(0,-3.3) 3(2.3,-3.3)
  rect 3.4x1.75 smd: 4(0,3.3)
  silkscreen extent -3.35,-4.85 3.35,1.85, body extent -3.25,-3.43 3.25,3.46, height 1.6
STM-LQFP48_N [mm] "QFP, 48-Leads, Body 7x7mm, Pitch 0.5mm, IPC Medium Density"
  oval 1.8x0.3 smd: 1(-4.05,2.75) 2(-4.05,2.25) 3(-4.05,1.75) 4(-4.05,1.25) 5(-4.05,0.75) 6(-4.05,0.25) 7(-4.05,-0.25) 8(-4.05,-0.75) 9(-4.05,-1.25) 10(-4.05,-1.75) 11(-4.05,-2.25) 12(-4.05,-2.75) 25(4.05,-2.75) 26(4.05,-2.25) 27(4.05,-1.75) 28(4.05,-1.25) 29(4.05,-0.75) 30(4.05,-0.25) 31(4.05,0.25) 32(4.05,0.75) 33(4.05,1.25) 34(4.05,1.75) 35(4.05,2.25) 36(4.05,2.75)
  oval 0.3x1.8 smd: 13(-2.75,-4.05) 14(-2.25,-4.05) 15(-1.75,-4.05) 16(-1.25,-4.05) 17(-0.75,-4.05) 18(-0.25,-4.05) 19(0.25,-4.05) 20(0.75,-4.05) 21(1.25,-4.05) 22(1.75,-4.05) 23(2.25,-4.05) 24(2.75,-4.05) 37(2.75,4.05) 38(2.25,4.05) 39(1.75,4.05) 40(1.25,4.05) 41(0.75,4.05) 42(0.25,4.05) 43(-0.25,4.05) 44(-0.75,4.05) 45(-1.25,4.05) 46(-1.75,4.05) 47(-2.25,4.05) 48(-2.75,4.05)
  silkscreen extent -4.17,-2.75 2.75,3.57, body extent -3.5,-3.5 3.5,3.5, height 1.6
TACTM-34N-F [mm]
  rect 2.5x1.6 smd: 1(-4.545,0) 2(4.778,0)
  silkscreen extent -2.95,-1.78 3.17,1.82, body extent -3.88,-1.78 4.13,1.73, height 5.5
TANTAL-A-1206 [mm]
  rect 2x1.2 smd: 1(-1.4,0) 2(1.4,0)
  silkscreen extent -1.3,-1.2 1.1,1.2, body extent -1.6,-0.8 1.6,0.8, height 1.8
TSSOP-14 [mm] "Shrink Small Outline; 14 Leads; Body Width 4.4 mm; Pitch 0.65 mm"
  rect 0.3x1.65 smd: 1(-1.95,-2.775) 2(-1.3,-2.775) 3(-0.65,-2.775) 4(0,-2.775) 5(0.65,-2.775) 6(1.3,-2.775) 7(1.95,-2.775) 8(1.95,2.775) 9(1.3,2.775) 10(0.65,2.775) 11(0,2.775) 12(-0.65,2.775) 13(-1.3,2.775) 14(-1.95,2.775)
  silkscreen extent -2.77,-2.9 2.55,1.55, body extent -2.5,-3.2 2.5,3.2, height 1.2

## Part data
C1 C2 C3 C4 C5 C7 C8 C9 C10 C11 C12 C13 C14 C15 C16 C17 C18 C19 C20 C21 C22 C23 C24 C25 C26 C27 C28 C29 C30 C31 C32 C33 C34 C35 C36 C37 C38 C39 C40 C41 C42 C43 C44 C45 C46 C47 C48 C49 C50 C51 C52 C53 C54 C55 C56 C57 C58 C59 C60 C61 C62 C63 C64 C65 C66 C67 C68 C69 C70 C71 C72 C73 C78 C79 C80 C82 C83 C84 C87 C88 C90 C91 C92 C93 C94 C95 C96 C97 C98 C99 C100 C101 C102 C103 C104 C106 C107 C108 C109: library part CAP_NPOL, "CAP_NPOL"
C6 C76 C77 C85 C86 C89: library part CAP_POL, "CAP_POL"
CN1: library part "HDR 2", "Header, 2-Pin", LatestRevisionDate=17-Jul-2002, LatestRevisionNote="Re-released for DXP Platform.", Publisher="Altium Limited"
CN2: library part "HDR 14", "Header, 14-Pin", LatestRevisionDate=17-Jul-2002, LatestRevisionNote="Re-released for DXP Platform.", Publisher="Altium Limited"
CN3: library part "HDR 4", "Header, 4-Pin", LatestRevisionDate=17-Jul-2002, LatestRevisionNote="Re-released for DXP Platform.", Publisher="Altium Limited"
CN4: library part "HDR 8", "Header, 8-Pin", LatestRevisionDate=17-Jul-2002, LatestRevisionNote="Re-released for DXP Platform.", Publisher="Altium Limited"
CN5 TP1 TP2 TP3 TP4 X1: "PCB terminal block"
D2: library part TVS_BIDIR_DUAL, "TVS Diodes"
J1: library part PhoneJack, "Phonejack Stereo"
L1 L2 L11 L12 L13 L14 L15 L16 L17 L18 L19 L20: library part IND_WO_IRON, "IND_WO_IRON"
L3 L4 L5 L6 L7 L8 L9 L10: library part IND_W_IRON, "IND_W_IRON"
LD1: library part LED_YELLOW, "LED Yellow"
LD2: library part LED_RED, "LED Red"
P1: library part "HDR 6X2", "Header, 6-Pin, Dual row", LatestRevisionDate=17-Jul-2002, LatestRevisionNote="Re-released for DXP Platform.", Publisher="Altium Limited"
P2: "Header, 14-Pin", LatestRevisionDate=17-Jul-2002, LatestRevisionNote="Re-released for DXP Platform.", Publisher="Altium Limited"
P3: library part "HDR 12X2", "Header, 12-Pin, Dual row", LatestRevisionDate=17-Jul-2002, LatestRevisionNote="Re-released for DXP Platform.", Publisher="Altium Limited"
P4: "Header, 3-Pin", LatestRevisionDate=17-Jul-2002, LatestRevisionNote="Re-released for DXP Platform.", Publisher="Altium Limited"
Q1: library part P-Channel, "HEXFET Power MOSFET"
R1 R2 R3 R4: library part RESISTOR
R5 R6 R7 R8 R9 R10 R11 R12 R13 R14 R15 R16 R17 R18 R19 R20 R21 R22 R23 R24 R25 R26 R27 R28 R29 R30 R31 R32 R33 R34 R35 R36 R37 R38 R39 R40 R41 R42 R43 R44 R45 R46 R47 R48 R49 R50 R51 R52 R53 R54 R55 R56 R57 R58 R60 R61 R62 R63 R64 R65 R66 R67 R68 R69 R70 R71 R72 R73 R74: library part RESISTOR, "RES"
R59: library part ARRAY, "ARRAY"
SW1: library part "SW tact 2-pin", "Microswitches, DTSMB-3 series"
U1: library part SN74LVC1G08
U2: "75-W, 2-MHz Digital Input 4-Channel Automotive Class-D Audio Amplifier  With Load-Dump Protection and I  2C Diagnostics"
U3: library part TPA6138A2, "DirectPath™ Headphone Driver With Adjustable Gain"
U4: "Multi-channel digital audio processor with DDX®"
U5: "OPAx172 36-V, Single-Supply, 10-MHz, Rail-to-Rail Output Operational Amplifiers"
U6 U7: "PCM1808 Single-Ended, Analog-Input 24-Bit, 96-kHz Stereo ADC"
U8: library part LM1117, "LM1117"
U9: "ARM Cortex-M4 32-bit MCU, 128 KB Flash, 32 KB Internal RAM, 37 I/Os, 48-pin LQFP, -40 to 85 degC, Tray", I/Os (High Current)=37, Operating Frequency(F) (Processor speed) (MHz)=72, Supplier Part Number 1=STM32F303CBT6-ND, Supply Voltage(Vcc) min (V)=2, ComponentLink1Description="Manufacturer URL", ComponentLink1URL=http://www.st.com/web/en/home.html, ComponentLink2Description=Datasheet, ComponentLink2URL=http://www.st.com/st-web-ui/static/active/en/resource/technical/document/datasheet/DM00058181.pdf, ComponentLink3Description="Package Specification", ComponentLink3URL=http://www.st.com/st-web-ui/static/active/en/resource/technical/document/datasheet/DM00058181.pdf, Core="ARM Cortex-M4", D/A Converter="2x12-bit (2 Channel)", DatasheetVersion="Rev. 6", FLASH Size (Prog) (kB)=128, Internal RAM Size (kB)=32, Mounting Technology="Surface Mount", PackageDescription="48-Pin Low Profile Quad Flat Package, 7 x 7 mm Body, 0.5 mm Pitch", PackageReference=LQFP48, PackageVersion="Rev. 6, 06/2013", Packing=Tray, PartNumber=STM32F303CBT6, Supplier 1=Digi-Key, Supplier 2=Newark, Supplier 3=Newark, Supplier Part Number 2=99W9871, Supplier Part Number 3=66W7285
VT1: library part N-P-N, "Bipolar transistor N-P-N"
XO1: library part CXO-7C
XT1 XT2: "Xtal"

## Free pads (board coordinates)
  round 5 hole 3: MH(58.674,266.065) MH(103.124,294.047)
  round 6 hole 3: MH(127.635,192.278) MH(127.635,225.806) MH(127.762,361.95) MH(271.145,192.151) MH(271.145,230.505) MH(271.145,313.686) MH(271.145,361.95)

## Nets (pads, with @x,y where several pads share a name; then routed paths per layer and width w, separated by ;. In a path a pad name is that pad's centre, name@x,y a point inside that pad or via, vN(x,y) a via of type N, cw(c..) or ccw(c..) an arc to the next point about the centre after c; other vN are vias at no path point)
3V3: C12.1 C94.2 C95.1 C96.1 C98.1 C100.1 CN3.1 CN4.1 D1.1 L2.2 L11.2 L12.1 L13.2 L17.2 L19.2 L20.2 R5.1 R7.1 R9.1 R10.1 R71.2 R74.2 U1.5 U8.2 U9.24 U9.36 U9.48
5V0: CN2.5 CN2.6 CN2.7 L15.2 L18.1 P2.2 P3.23 P3.24
ADSP_PWEN: R36.1 U4.64 U9.38
ADSP_PWMA_7: C47.2 U4.32
ADSP_PWMA_8: C44.2 U4.30
ADSP_PWMB_7: C46.2 U4.31
ADSP_PWMB_8: C45.2 U4.29
ADSP_RST#: R35.1 U4.15 U9.31
ADSP_VDD: C63.2 C64.1 C65.1 C66.1 C67.1 C68.1 C69.1 C70.1 C71.1 C72.1 L13.1 U4.3 U4.12 U4.24 U4.28 U4.35 U4.44 U4.52 U4.59
AIN_5V0: C73.1 C84.1 C87.1 C89.1 L15.1 R43.1 R46.1 U5.5 U6.3 U7.3
AIN_D3V3: C90.2 C91.1 C92.1 L17.1 R53.2 U6.4 U7.4
AIN_GND: C73.2 C75.2 C78.2 C80.2 C82.2 C83.2 C84.2 C85.2 C86.2 C87.2 C88.2 C89.2 CN1.2 L16.1 R44.2 R45.2 R47.2 U5.2 U6.2 U7.2
AMP_3V3: C8.2 L2.1 U2.19
AMP_I2S_BCLK: R38.2 U2.13
AMP_I2S_LRCK: U2.14 U4.56
AMP_I2S_SDI_12: R39.2 U2.15
AMP_I2S_SDI_34: R40.2 U2.16
AMP_INT#: R70.1 U1.4
AMP_MUTE#: R21.1 U2.25
AMP_PWEN: R4.1 U9.26
AMP_STBY#: R42.2 U2.24
AUX_GPIO0: CN2.9 R66.1
AUX_GPIO1: CN2.10 R67.1
AUX_UART_RX: CN2.11 R69.1
AUX_UART_TX: CN2.12 R68.1
CAN_RX: U9.45 U10.4
CAN_TX: U9.46 U10.1
CANH: CN5.1 D2.2 R73.1 U10.7
CANL: CN5.2 D2.1 R72.1 U10.6
ENC_TUNE_A: CN4.5 U9.32
ENC_TUNE_B: CN4.6 U9.33
ENC_VOL_A: CN4.2 U9.29
ENC_VOL_B: CN4.3 U9.30
GND: C1.1 C2.2 C3.2 C4.2 C5.1 C6.2 C7.2 C8.1 C9.2 C10.2 C11.2 C12.2 C15.1 C16.2 C18.1 C19.2 C28.2 C29.2 C30.2 C31.2 C32.2 C33.2 C34.2 C35.2 C36.2 C37.2 C38.2 C39.2 C40.2 C41.2 C42.2 C43.2 C50.2 C51.2 C54.2 C55.1 C56.1 C58.1 C59.2 C60.1 C61.2 C63.1 C64.2 C65.2 C66.2 C67.2 C68.2 C69.2 C70.2 C71.2 C72.2 C90.1 C91.2 C92.2 C93.1 C94.1 C95.2 C96.2 C97.2 C98.2 C99.2 C100.2 C101.2 C102.2 C103.2 C104.2 C105.2 C106.2 C107.2 C108.2 C109.1 CN2.2 CN2.4 CN2.8 CN3.4 CN4.8 CN5.3 D2.3 J1.1 L14.2 L16.2 P1.1 P1.3 P1.5 P1.7 P1.9 P1.11 P2.3 P2.7 P2.12 P3.3 P3.4 P3.11 P3.12 P3.18 P3.21 P3.22 P4.3 pad.MH@127.635,192.278 pad.MH@127.635,225.806 pad.MH@127.762,361.95 pad.MH@271.145,230.505 pad.MH@271.145,313.686 pad.MH@271.145,361.95 R3.1 R6.2 R8.2 R22.2 R25.2 R27.1 R28.1 R34.1 R35.2 R36.2 R52.1 R54.1 R64.2 SW1.1 U1.3 U2.1 U2.11 U2.17 U2.18 U2.28 U2.33 U2.36 U2.39 U2.46 U2.49 U2.52 U3.4 U3.10 U4.2 U4.4 U4.13 U4.27 U4.36 U4.45 U4.53 U4.60 U6.5 U7.5 U8.1 U9.8 U9.23 U9.35 U9.47 U10.2 VT1.2 XO1.2
HPL: C59.1 J1.3 R24.1
HPR: C58.2 J1.2 R23.1
I2C_SCL: CN2.13 P2.9 R71.1 U2.20 U4.19 U9.42
I2C_SDA: CN2.14 P2.8 R74.1 U2.21 U4.18 U9.43
I2S_AUX_SDO: R33.1 R56.2
I2S_RADIO_SDO: P2.4 R32.1
I2S_REF_BCLK: P2.6 P3.2 R29.1 R57.2 U6.8 U7.8
I2S_REF_LRCK: P2.5 P3.5 P3.6 R58.2 U4.10 U6.7 U7.7
I2S_SOC_SDI0: P3.8 R55.2
I2S_SOC_SDI1: P3.7
I2S_SOC_SDO0: P3.10 R30.1
I2S_SOC_SDO1: P3.9 R31.1 R41.2
KEY1: CN4.4 U9.27
KEY2: CN4.7 U9.28
NetC3_1: C3.1 C5.2 L1.1 U2.3
NetC13_1: C13.1 U2.6
NetC13_2: C13.2 C17.2 U2.4
NetC14_1: C14.1 U2.8
NetC14_2: C14.2 U2.7
NetC15_2: C15.2 U2.9
NetC17_1: C17.1 U2.5
NetC18_2: C18.2 U2.10
NetC20_2: C20.2 U2.54
NetC21_2: C21.2 U2.50
NetC22_2: C22.2 U2.48
NetC23_2: C23.2 U2.44
NetC24_2: C24.2 U2.37
NetC25_2: C25.2 U2.35
NetC26_2: C26.2 U2.31
NetC27_2: C27.2 U2.41
NetC44_1: C44.1 R11.2
NetC45_1: C45.1 R12.2
NetC46_1: C46.1 R13.2
NetC47_1: C47.1 R14.2
NetC48_1: C48.1 R12.1 R17.2
NetC48_2: C48.2 R11.1 R15.2 R16.2
NetC49_1: C49.1 R14.1 R19.2 R20.2
NetC49_2: C49.2 R13.1 R18.2
NetC50_1: C50.1 R17.1 U3.14
NetC51_1: C51.1 R18.1 U3.1
NetC52_1: C52.1 R16.1 U3.13
NetC52_2: C52.2 R15.1 R23.2 U3.12
NetC53_1: C53.1 R20.1 R24.2 U3.3
NetC53_2: C53.2 R19.1 U3.2
NetC54_1: C54.1 C55.2 L11.1 U3.9
NetC56_2: C56.2 U3.6
NetC57_1: C57.1 U3.7
NetC57_2: C57.2 U3.8
NetC60_2: C60.2 L12.2 XO1.4
NetC61_1: C61.1 R26.2 XO1.3
NetC62_1: C62.1 R37.2
NetC74_1: C74.1 CN1.1 R43.2
NetC74_2: C74.2 C79.1 R50.2 U5.4
NetC75_1: C75.1 R46.2 R47.1 U5.3
NetC76_1: C76.1 R48.1
NetC76_2: C76.2 CN2.1 R44.1
NetC77_1: C77.1 R49.1
NetC77_2: C77.2 CN2.3 R45.1
NetC78_1: C78.1 R49.2 U7.13
NetC79_2: C79.2 C81.1 R50.1 U5.1
NetC80_1: C80.1 R48.2 U7.14
NetC81_2: C81.2 R51.1
NetC82_1: C82.1 C85.1 U6.1
NetC83_1: C83.1 C86.1 U7.1
NetC88_1: C88.1 R51.2 U6.13 U6.14
NetC93_2: C93.2 L18.2 U8.3
NetC97_1: C97.1 U9.3 XT1.1
NetC99_1: C99.1 U9.4 XT1.2
NetC101_1: C101.1 U9.5 XT2.1
NetC102_1: C102.1 C104.1 L19.1 U9.9
NetC103_1: C103.1 R63.2 XT2.2
NetC105_1: C105.1 R62.1 U9.1
NetC106_1: C106.1 SW1.2 TP4.1 U9.7
NetC107_1: C107.1 C108.1 L20.1 U10.3
NetC109_2: C109.2 R72.2 R73.2
NetD1_2: D1.2 R62.2
NetLD1_1: LD1.1 U1.2 U2.26
NetLD1_2: LD1.2 R9.2
NetLD2_1: LD2.1 U1.1 U2.27
NetLD2_2: LD2.2 R10.2
NetQ1_1: Q1.1 R1.2 R2.2
NetR2_1: R2.1 VT1.3
NetR3_2: R3.2 R4.2 VT1.1
NetR5_2: R5.2 R6.1 U2.23
NetR7_2: R7.2 R8.1 U2.22
NetR21_2: R21.2 R22.1 TP1.1 U3.5
NetR27_2: R27.2 U4.16
NetR28_2: R28.2 U4.1
NetR29_2: R29.2 U4.11
NetR30_2: R30.2 U4.9
NetR31_2: R31.2 U4.8
NetR32_2: R32.2 U4.7
NetR33_2: R33.2 U4.6
NetR34_2: R34.2 U4.17
NetR37_1: R37.1 U4.21
NetR38_1: R38.1 U4.55
NetR39_1: R39.1 U4.57
NetR40_1: R40.1 U4.58
NetR41_1: R41.1 U4.62
NetR42_1: R42.1 U4.51
NetR52_2: R52.2 U6.10 U6.11 U7.10 U7.11
NetR53_1: R53.1 R54.2 U6.12 U7.12
NetR55_1: R55.1 U6.9
NetR56_1: R56.1 U7.9
NetR57_1: R57.1 U9.11
NetR58_1: R58.1 U9.12
NetR59_1: R59.1 U9.17
NetR59_3: R59.3 U9.16
NetR59_5: R59.5 U9.15
NetR59_7: R59.7 U9.14
NetR60_1: R60.1 U9.34
NetR61_1: R61.1 U9.37
NetR63_1: R63.1 U9.6
NetR64_1: R64.1 U9.44
NetR65_2: R65.2 U9.18
NetR66_2: R66.2 U9.19
NetR67_2: R67.2 U9.20
NetR68_2: R68.2 U9.21
NetR69_2: R69.2 U9.22
NetR70_2: R70.2 U9.25
NetTP2_1: TP2.1 U4.63
NetTP3_1: TP3.1 U4.25
OUT1+: C34.1 C42.1 L9.2 X1.7
OUT1-: C35.1 C43.1 L10.2 X1.8
OUT1M: C26.1 L10.1 U2.32
OUT1P: C25.1 L9.1 U2.34
OUT2+: C32.1 C40.1 L7.2 X1.5
OUT2-: C33.1 C41.1 L8.2 X1.6
OUT2M: C24.1 L8.1 U2.38
OUT2P: C27.1 L7.1 U2.40
OUT3+: C30.1 C38.1 L5.2 X1.3
OUT3-: C31.1 C39.1 L6.2 X1.4
OUT3M: C23.1 L6.1 U2.45
OUT3P: C22.1 L5.1 U2.47
OUT4+: C28.1 C36.1 L3.2 X1.1
OUT4-: C29.1 C37.1 L4.1 X1.2
OUT4M: C21.1 L4.2 U2.51
OUT4P: C20.1 L3.1 U2.53
PLLGND: C62.2 L14.1 U4.23
PVDD: C2.1 C4.1 C6.1 C7.1 C9.1 C10.1 C11.1 C16.1 C19.1 Q1.2 U2.2 U2.29 U2.30 U2.42 U2.43 U2.55 U2.56
RADIO_INT#: P2.10 U9.40
RADIO_LOUT: P2.14 P4.2
RADIO_PWEN: P2.1 U9.39
RADIO_ROUT: P2.13 P4.1
RADIO_RST#: P2.11 U9.41
REF_12288MHZ: R26.1 U2.12 U4.20 U6.6 U7.6 U9.10
REF_CLK_EN: R25.1 U9.13 XO1.1
SPI_SOC_CLK: P3.14 R59.6
SPI_SOC_CS#: P3.15 R59.8
SPI_SOC_INT#: P3.17 R65.1
SPI_SOC_RX: P3.13 R59.4
SPI_SOC_TX: P3.16 R59.2
SWCLK: CN3.3 R61.2
SWDIO: CN3.2 R60.2
VIN: C1.2 L1.2 P1.2 P1.4 P1.6 P1.8 P1.10 P1.12 Q1.3 R1.1
pads on no net: J1.H P3.1 P3.19 P3.20 U3.11 U4.5 U4.14 U4.22 U4.26 U4.33 U4.34 U4.37 U4.38 U4.39 U4.40 U4.41 U4.42 U4.43 U4.46 U4.47 U4.48 U4.49 U4.50 U4.54 U4.61 U8.4 U9.2 U10.5 U10.8 XT1.3

## Other copper
Multi-Layer:
  pour cut-out: 276.242,343.535 276.242,327.21 266.217,327.21 266.192,327.235 266.192,343.535
  pour cut-out: 242.351,356.997 226.025,356.997 226.025,367.022 226.05,367.047 242.351,367.047

## Silkscreen, mask and mechanical layers (free items; w line width, h text height)
Top Solder:
  text "O.G. Ukraine" at 244.475,362.331 h2
  text "PCB-1.0" at 244.475,359.156 h2
  text "X3399-EVK" at 244.475,354.887 h3
Mechanical 1:
  lines w0.254: 55.245,262.678 106.426,262.678 106.426,297.476 55.245,297.476 ; 55.245,262.932 55.245,297.222

## Text inside footprints (layer, text, board x,y; h text height)
P3: Top Overlay "1" at 273.05,247.142 h1; Top Overlay "2" at 272.923,244.475 h1; Top Overlay "23" at 239.141,247.142 h1; Top Overlay "24" at 239.141,244.602 h1